# EAGLE board Laser Tag Reloaded PCB (EAGLE 6.2)
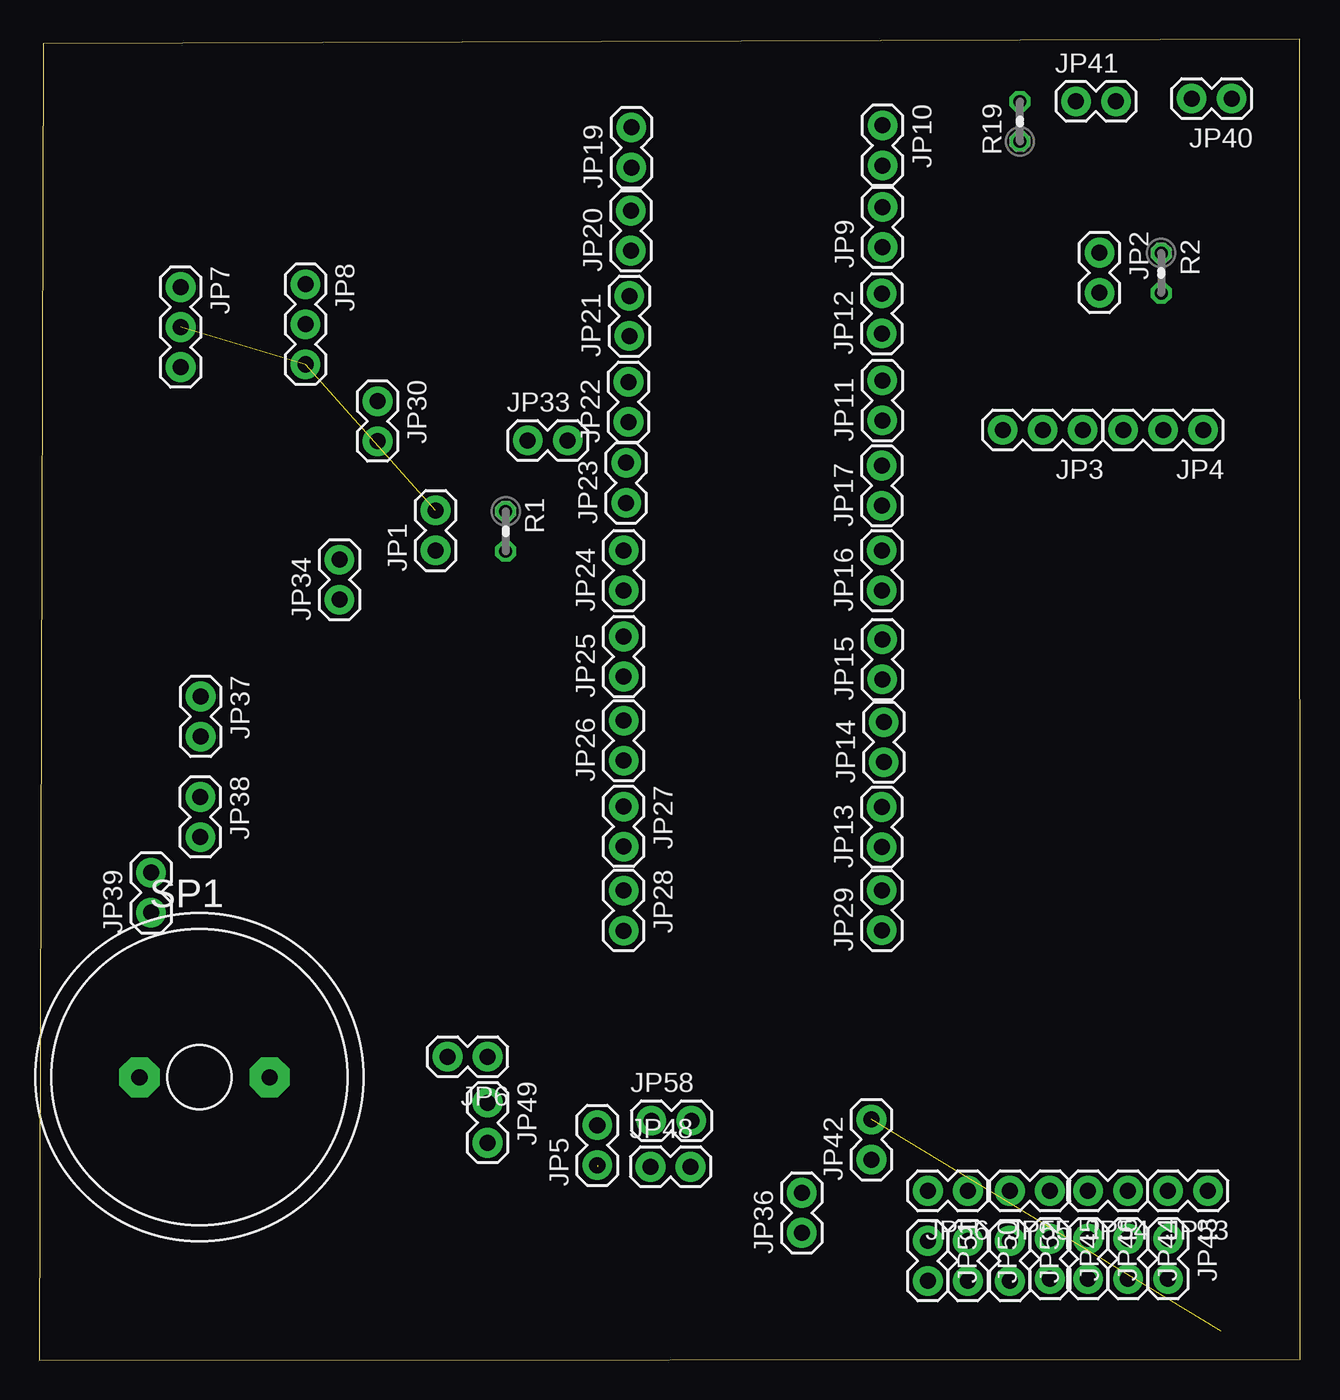
[diagram p0: board, top side]
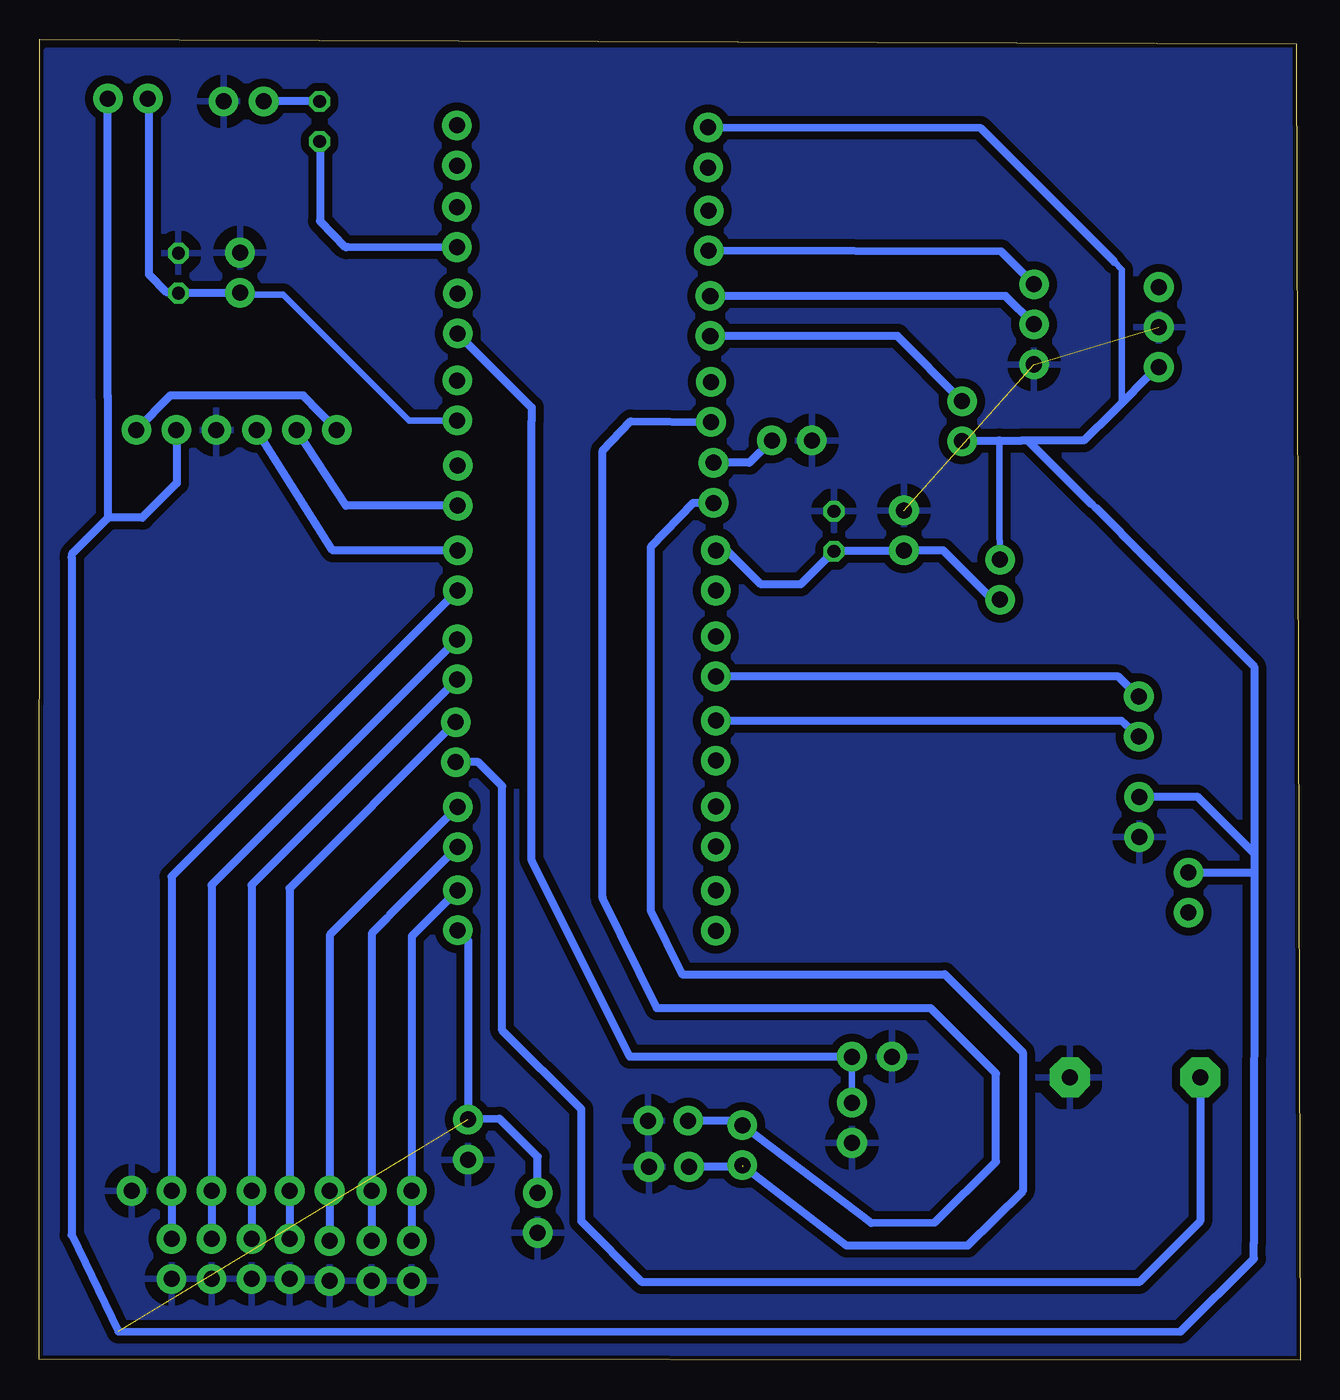
[diagram p1: board, bottom side, seen from below]

Size 80.02 x 83.82 mm. Coordinates in mm from the lower left corner, seen from the top.
Outline: 0,0 80.02,0.05 79.99,83.82 0.25,83.54 0,0
Copper layers (1*16): Top 0.035mm / dielectric 1.5mm / Bottom 0.035mm
Design rules: minimum track width 6mil, minimum drill 12mil, track to track 20mil, track to pad 20mil, pad to pad 20mil, via to via 20mil, smd to smd 0mil, copper to edge 10mil, drill to drill 10mil, minimum pad ring 10mil, minimum via ring 6mil, stop-mask expansion 2mil, vias tented up to drill 100mil, thermal gap 30mil

## Footprints (pad centres in the part's own frame; a part is rotated, then mirrored left to right if it is on the bottom)
1X02 = drill 1.016 pad 1.88: 1 0,0; 2 2.54,0
1X03 = drill 1.016 pad 1.88: 1 0,0; 2 2.54,0; 3 5.08,0
0204V = drill 0.813 octagon: 1 -1.27,0; 2 1.27,0
AL201P = drill 1.016 pad 2.54 octagon: 1 -3.81,0; 2 4.445,0

## Placement (x,y rotation side)
JP1  [1X02]  25.15,51.38 90 top
JP2  [1X02]  67.28,70.28 270 top
JP3  [1X03]  66.22,59.03 180 top
JP4  [1X03]  73.86,59.03 180 top
JP5  [1X02]  35.41,12.37 90 top
JP6  [1X02]  28.45,19.25 180 top
JP7  [1X03]  8.97,68.1 270 top
JP8  [1X03]  16.89,68.28 270 top
JP9  [1X02]  53.52,70.64 90 top
JP10  [1X02]  53.52,78.36 270 top
JP11  [1X02]  53.49,59.64 90 top
JP12  [1X02]  53.47,65.15 90 top
JP13  [1X02]  53.47,32.56 90 top
JP14  [1X02]  53.59,37.95 90 top
JP15  [1X02]  53.49,43.21 90 top
JP16  [1X02]  53.47,48.84 90 top
JP17  [1X02]  53.47,54.23 90 top
JP19  [1X02]  37.57,75.69 90 top
JP20  [1X02]  37.54,70.41 90 top
JP21  [1X02]  37.44,65 90 top
JP22  [1X02]  37.39,59.54 90 top
JP23  [1X02]  37.24,54.41 90 top
JP24  [1X02]  37.08,48.84 90 top
JP25  [1X02]  37.08,43.38 90 top
JP26  [1X02]  37.08,38.05 90 top
JP27  [1X02]  37.08,35.13 270 top
JP28  [1X02]  37.08,29.79 270 top
JP29  [1X02]  53.47,27.28 90 top
JP30  [1X02]  21.46,60.86 270 top
JP33  [1X02]  30.99,58.37 0 top
JP34  [1X02]  19.05,48.26 90 top
JP36  [1X02]  48.39,8.08 90 top
JP37  [1X02]  10.24,42.11 270 top
JP38  [1X02]  10.21,35.74 270 top
JP39  [1X02]  7.09,28.4 90 top
JP40  [1X02]  75.67,80.06 180 top
JP41  [1X02]  65.79,79.88 0 top
JP42  [1X02]  52.81,12.73 90 top
JP43  [1X02]  71.63,7.7 270 top
JP44  [1X02]  69.09,7.7 270 top
JP45  [1X02]  64.14,7.7 270 top
JP46  [1X02]  66.55,7.7 270 top
JP48  [1X02]  38.79,12.27 0 top
JP49  [1X02]  28.45,16.33 270 top
JP50  [1X02]  58.93,7.57 270 top
JP51  [1X02]  56.39,7.57 270 top
JP52  [1X02]  61.59,7.57 270 top
JP53  [1X02]  74.17,10.74 180 top
JP54  [1X02]  69.09,10.74 180 top
JP55  [1X02]  64.14,10.74 180 top
JP56  [1X02]  58.93,10.74 180 top
JP58  [1X02]  38.84,15.19 0 top
R1  1k  [0204V]  29.59,52.6 270 top
R2  1k  [0204V]  71.2,68.99 270 top
R19  10  [0204V]  62.23,78.61 90 top
SP1  AL201P  [AL201P]  10.16,17.96 0 top

## Library data of the parts
JP1-JP17 JP19-JP30 JP33 JP34 JP36-JP46 JP48-JP56 JP58 = SparkFun-Connectors
R1 R2 R19 = resistor
SP1 = buzzer; OC_FARNELL: unknown; OC_NEWARK: unknown

## Nets
GND: JP1.2 JP2.1 JP4.3 JP6.2 JP7.2 JP8.3 JP33.1 JP36.1 JP38.2 JP41.2 JP42.1 JP43.2 JP44.2 JP45.2 JP46.2 JP48.2 JP49.2 JP50.2 JP51.2 JP52.2 JP53.1 JP58.2 R1.1 R2.1 SP1.2
N$1: JP1.1 JP24.2 JP34.1 R1.2
N$2: JP3.3 JP4.1
N$3: JP5.2 JP22.1 JP58.1
N$4: JP21.1 JP30.1
N$5: JP23.2 JP33.2
N$6: JP41.1 R19.2
N$8: JP2.2 JP11.1 JP40.2 R2.2
N$9: JP5.1 JP23.1 JP48.1
N$10: JP25.1 JP37.1
N$12: JP26.2 JP37.2
N$13: JP8.1 JP20.1
N$14: JP9.1 R19.1
N$15: JP8.2 JP21.2
N$16: JP6.1 JP12.1 JP49.1
N$17: JP14.1 SP1.1
N$19: JP3.2 JP17.1
N$20: JP3.1 JP16.2
N$21: JP16.1 JP43.1 JP53.2
N$22: JP15.2 JP44.1 JP54.1
N$23: JP15.1 JP46.1 JP54.2
N$24: JP14.2 JP45.1 JP55.1
N$26: JP13.2 JP52.1 JP55.2
N$27: JP13.1 JP50.1 JP56.1
N$30: JP29.2 JP51.1 JP56.2
VCC: JP4.2 JP7.3 JP19.2 JP29.1 JP30.2 JP34.2 JP36.2 JP38.1 JP39.2 JP40.1 JP42.2

## Tracks (layer width: path | path; a pad name or v marks a point on that pad's centre or on a via)
GND  (2 unrouted)
  pour Bottom: 0.25,83.11 79.55,83.11 79.58,0.05 0.38,0.08
N$1
  Bottom 0.406: 31.7,49.23 31.93,49.23 | JP1.1 25.2,51.33
  Bottom 0.508: 31.8,49.23 31.93,49.23 34.21,49.23 36.4,51.41 JP24.2 | JP1.1 22.66,51.38 19.53,48.26 JP34.1 | 31.7,49.23 R1.2 25.2,51.33
N$2
  Bottom 0.508: JP3.3 63.27,61.21 71.7,61.21 JP4.1
N$3
  Bottom 0.508: JP22.1 42.49,59.59 44.27,57.73 44.27,29.34 40.82,22.33 23.44,22.33 19.3,18.19 19.3,12.6 23.19,8.74 27.23,8.71 JP5.2 35.69,15.19 JP58.1
N$4
  Bottom 0.508: JP30.1 25.55,65 JP21.1
N$5
  Bottom 0.508: JP33.2 34.95,56.95 JP23.2
N$6
  Bottom 0.508: R19.2 JP41.1
N$8
  Bottom 0.406: 67.28,67.72 JP2.2 67.16,67.62 64.54,67.62 56.57,59.64 JP11.1 | JP40.2 73.08,80.01
  Bottom 0.508: 67.28,67.72 R2.2 71.96,67.79 73.08,68.91 73.08,80.01
N$9  (1 unrouted)
  Bottom 0.508: 35.41,12.27 JP48.1 | JP23.1 38.53,54.41 41.22,51.59 41.22,28.55 39.22,24.49 22.55,24.49 17.6,19.53 17.6,10.72 21.11,7.26 28.78,7.26 JP5.1
N$10
  Bottom 0.508: JP37.1 11.53,43.38 JP25.1
N$12
  Bottom 0.508: JP37.2 11.38,40.59 JP26.2
N$13
  Bottom 0.508: JP8.1 18.97,70.36 JP20.1
N$14
  Bottom 0.406: JP9.1 53.42,70.59 | R19.1 62.2,77.32
  Bottom 0.508: 53.42,70.59 60.48,70.64 60.61,70.64 62.2,72.29 62.2,77.32
N$15
  Bottom 0.508: JP8.2 18.69,67.54 JP21.2
N$16
  Bottom 0.406: JP6.1 JP49.1
  Bottom 0.508: JP6.1 42.55,19.25 48.77,31.7 48.77,59.64 48.77,60.45 JP12.1
N$17
  Bottom 0.508: SP1.1 6.35,8.81 10.21,4.95 41.76,4.95 45.62,8.81 45.62,15.93 50.65,20.93 50.65,36.42 52.17,37.95 JP14.1
N$19
  Bottom 0.508: JP17.1 60.55,54.23 JP3.2
N$20
  Bottom 0.508: JP16.2 61.39,51.38 JP3.1
N$21
  Bottom 0.508: JP43.1 71.63,10.21 JP53.2 71.63,30.68 JP16.1
N$22
  Bottom 0.508: JP44.1 JP54.1 69.09,30.15 JP15.2
N$23
  Bottom 0.508: JP46.1 JP54.2 66.55,30.15 JP15.1
N$24
  Bottom 0.508: JP45.1 JP55.1 64.14,29.95 JP14.2
N$26
  Bottom 0.508: JP52.1 JP55.2 61.59,26.98 JP13.2
N$27
  Bottom 0.406: 57.81,28.22 57.94,28.07
  Bottom 0.508: JP50.1 JP56.1 58.93,27.08 57.94,28.07 | JP13.1 57.81,28.22
N$30
  Bottom 0.508: JP51.1 JP56.2 56.39,26.9 JP29.2
VCC  (1 unrouted)
  Bottom 0.406: 17.27,58.37 17.65,58.37 | JP38.1 10.19,35.76 | JP39.2 7.06,30.96 | 12.98,54.1 13.21,54.31 | 75.69,53.47 75.76,53.34 | 77.95,51.15 77.98,50.95 | JP4.2 71.3,59 | 11.8,69.71 11.31,69.22 11.31,60.74 | JP34.2 19.1,53.31 19.1,58.37 19.15,58.32 | 75.69,61.14 75.67,61.16
  Bottom 0.508: 2.92,32.16 2.92,30.96 | 2.92,30.96 2.93,7.47 2.93,6.44 7.59,1.8 75.01,1.83 77.98,7.95 77.98,50.95 | 2.92,32.16 2.92,44.02 9.73,50.85 12.98,54.1 | 2.92,32.16 6.53,35.76 10.19,35.76 | 13.21,54.31 17.27,58.37 | JP36.2 48.39,12.9 50.83,15.32 JP42.2 52.81,26.62 JP29.1 | JP19.2 20.3,78.21 11.8,69.71 | 7.06,30.96 2.92,30.96 | JP7.3 9.68,62.38 11.31,60.74 11.82,60.22 13.74,58.37 17.65,58.37 19.1,58.37 | 75.69,61.14 75.69,53.47 73.48,53.47 71.3,55.65 71.3,59 | 75.76,53.34 77.95,51.15 | 19.15,58.32 JP30.2 | 75.67,61.16 JP40.1